# EAGLE board Sensor_Dio Faziko Pratama (EAGLE 9.6.2)
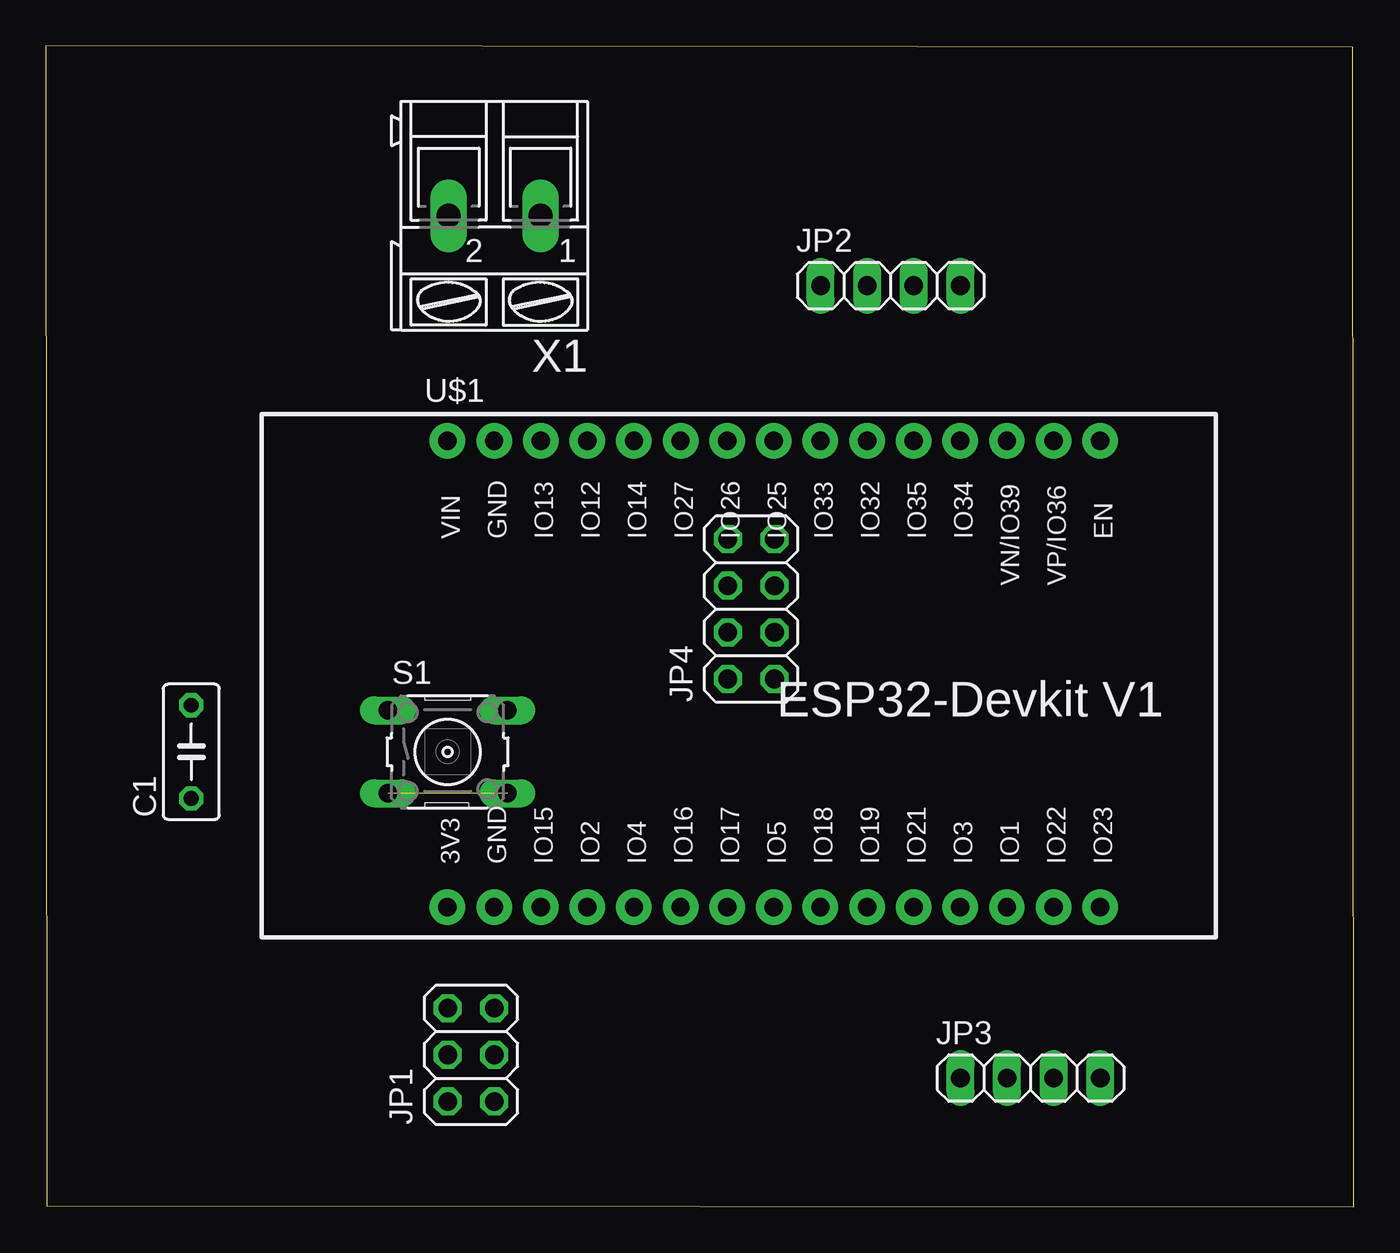
[diagram p0: board, top side]
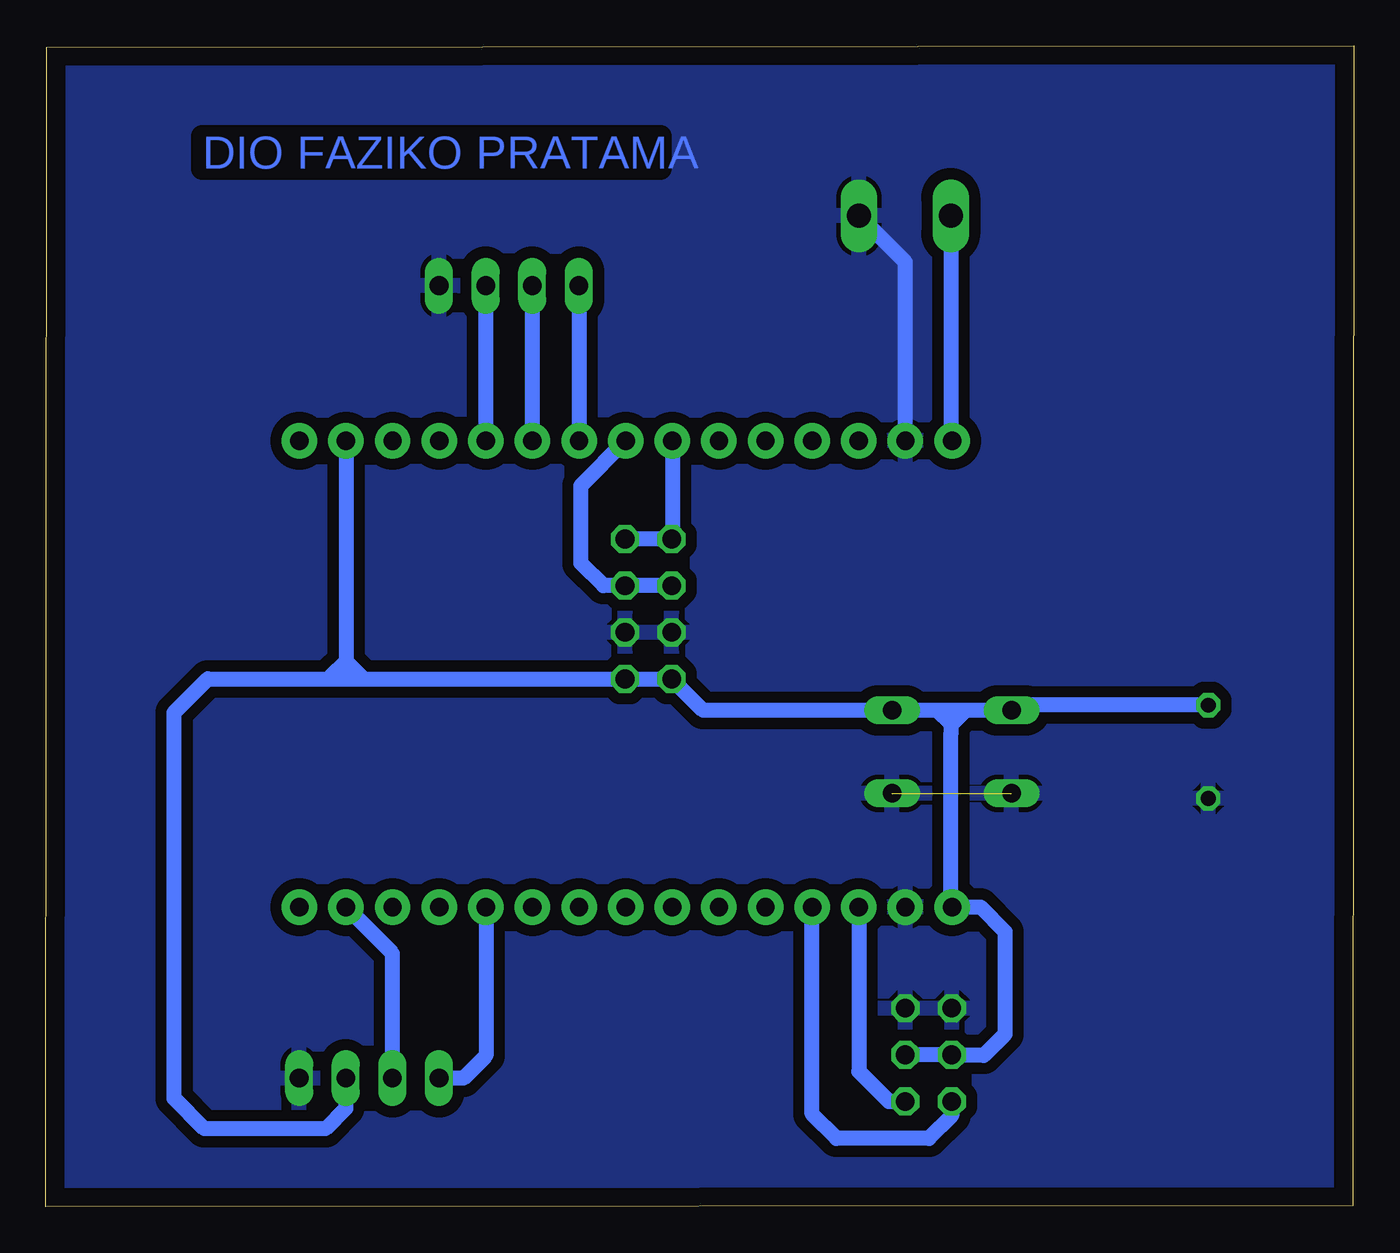
[diagram p1: board, bottom side, seen from below]

Size 71.26 x 63.26 mm. Coordinates in mm from the lower left corner, seen from the top.
Outline: 0.05,0.07 71.25,0 71.2,63.19 0,63.26 0.05,0.07
Copper layers (1*16): Top 0.035mm / dielectric 1.5mm / Bottom 0.035mm
Design rules "default": minimum track width 6mil, minimum drill 0.35mm, track to track 6mil, track to pad 6mil, pad to pad 6mil, via to via 6mil, smd to smd 6mil, copper to edge 40mil, drill to drill 6mil, minimum pad ring 10mil, minimum via ring 8mil, stop-mask expansion 4mil, vias tented up to drill 0mil, thermal gap 10mil

## Footprints (pad centres in the part's own frame; a part is rotated, then mirrored left to right if it is on the bottom)
C050-030X075 = drill 0.813 octagon: 1 -2.54,0; 2 2.54,0
2X03 = drill 1.016 octagon: 1 -2.54,-1.27; 2 -2.54,1.27; 3 0,-1.27; 4 0,1.27; 5 2.54,-1.27; 6 2.54,1.27
1X04 = drill 1.016 long: 1 -3.81,0; 2 -1.27,0; 3 1.27,0; 4 3.81,0
2X04 = drill 1.016 octagon: 1 -3.81,-1.27; 2 -3.81,1.27; 3 -1.27,-1.27; 4 -1.27,1.27; 5 1.27,-1.27; 6 1.27,1.27; 7 3.81,-1.27; 8 3.81,1.27
B3F-10XX = drill 1.016 long: 1 -3.251,2.261; 2 3.251,2.261; 3 -3.251,-2.261; 4 3.251,-2.261
ESP32-DEVKITV1 = drill 1 pad 1.93: 3V3 -16.52,-12.27; D1 13.96,-12.27; D2 -8.9,-12.27; D3 11.42,-12.27; D4 -6.36,-12.27; D5 1.26,-12.27; D12 -8.9,13.135; D13 -11.44,13.135; D14 -6.36,13.135; D15 -11.44,-12.27; D16 -3.82,-12.27; D17 -1.28,-12.27; D18 3.8,-12.27; D19 6.34,-12.27; D21 8.88,-12.27; D22 16.5,-12.27; D23 19.04,-12.27; D25 1.26,13.135; D26 -1.28,13.135; D27 -3.82,13.135; D32 6.34,13.135; D33 3.8,13.135; D34 11.42,13.135; D35 8.88,13.135; D36 16.5,13.135; D39 13.96,13.135; EN 19.04,13.135; GND@1 -13.98,13.135; GND@2 -13.98,-12.27; VIN -16.52,13.135
AK300/2 = drill 1.321 long: 1 -2.515,0; 2 2.489,0

## Placement (x,y rotation side)
C1  [C050-030X075]  7.92,24.8 90 top
JP1  [2X03]  23.16,8.29 90 top
JP2  [1X04]  46.02,50.2 0 top
JP3  [1X04]  53.64,7.02 0 top
JP4  [2X04]  38.43,32.58 90 top
S1  [B3F-10XX]  21.89,24.8 0 top
U$1  ESP32DEVKITV1  [ESP32-DEVKITV1]  38.4,28.61 0 top
X1  [AK300/2]  24.43,54.01 180 top

## Library data of the parts
C1 = rcl; SPICEPREFIX: C
JP1-JP4 = pinhead
S1 = switch-omron; MPN: B3F-1000; OC_FARNELL: 176432; OC_NEWARK: 36M3542
U$1 = esp32-devkitv1
X1 = con-ptr500; OC_FARNELL: unknown; OC_NEWARK: unknown

## Nets
GND: C1.1 JP1.5 JP1.6 JP2.4 JP3.4 JP4.3 JP4.4 S1.3 S1.4 U$1.GND@1 U$1.GND@2 X1.1
MOISTURE: JP1.2 U$1.D2
OUT1: JP2.1 U$1.D33
OUT2: JP2.2 U$1.D32
OUT3: JP2.3 U$1.D35
PH: JP1.1 U$1.D15
SCL: JP3.2 U$1.D22
SCL2: JP4.5 JP4.6 U$1.D25
SDA: JP3.1 U$1.D21
SDA2: JP4.7 JP4.8 U$1.D26
V: C1.2 JP1.3 JP1.4 JP3.3 JP4.1 JP4.2 S1.1 S1.2 U$1.3V3 U$1.D36
VIN: U$1.VIN X1.2

## Tracks (layer width: path | path; a pad name or v marks a point on that pad's centre or on a via)
GND  (1 unrouted)
  Bottom 0.813: U$1.GND@1 24.42,51.48 X1.1
  pour Bottom (isolate 0.61): 0.69,62.78 0.69,0.64 71.45,0.64 71.45,62.78 0.71,62.78
MOISTURE
  Bottom 0.813: JP1.2 21.89,4.97 23.13,3.73 28.19,3.73 29.5,5.05 U$1.D2
OUT1
  Bottom 0.813: JP2.1 42.21,41.75 U$1.D33
OUT2
  Bottom 0.813: JP2.2 44.75,41.75 U$1.D32
OUT3
  Bottom 0.813: JP2.3 47.29,41.75 U$1.D35
PH
  Bottom 0.813: U$1.D15 26.96,7.38 25.33,5.75 JP1.1
SCL
  Bottom 0.813: JP3.2 52.37,13.81 U$1.D22
SCL2
  Bottom 0.813: U$1.D25 42.1,39.3 42.1,35.07 40.88,33.85 JP4.5 JP4.6
SDA
  Bottom 0.813: U$1.D21 47.28,8.24 48.51,7.02 JP3.1
SDA2
  Bottom 0.813: U$1.D26 37.12,36.42 JP4.8 JP4.7
V
  Bottom 0.813: C1.2 18.36,27.34 S1.1 21.15,27.06 | 21.15,27.06 21.95,27.06 | 21.95,27.06 22.7,27.06 | 22.7,27.06 S1.2 35.45,27.06 JP4.2 JP4.1 53.94,28.77 | 21.95,26.25 21.95,27.06 | JP1.3 JP1.4 21.89,8.25 20.15,8.25 18.99,9.41 18.99,15 20.33,16.34 U$1.3V3 21.95,16.41 21.95,25.75 21.95,26.25 | JP3.3 54.91,5.37 56.02,4.26 62.62,4.26 64.27,5.91 64.27,26.93 62.44,28.77 55.75,28.77 | 55.75,28.77 54.8,28.77 | 54.8,28.77 53.94,28.77 | U$1.D36 54.9,29.73 | 54.9,29.73 54.9,28.87 54.8,28.77 | 54.9,29.73 53.94,28.77 | 54.9,29.73 55.75,28.89 55.75,28.77 | 21.15,27.06 21.95,26.25 | 21.95,26.25 21.95,26.31 22.7,27.06
VIN
  Bottom 0.813: X1.2 21.94,41.8 U$1.VIN

## Text on the board
Bottom: DIO FAZIKO PRATAMA